# Altium PCB PCB1.PcbDoc
Units mil, origin at the board's own origin, x right, y up, seen from the top; angles counter-clockwise.
Board outline 6000 x 4000 mil, 2 copper layers (Top Layer, Bottom Layer); 172 components, 101 nets, 459 pads, 0 vias.
Unrouted connection lines stored in the file: 347.
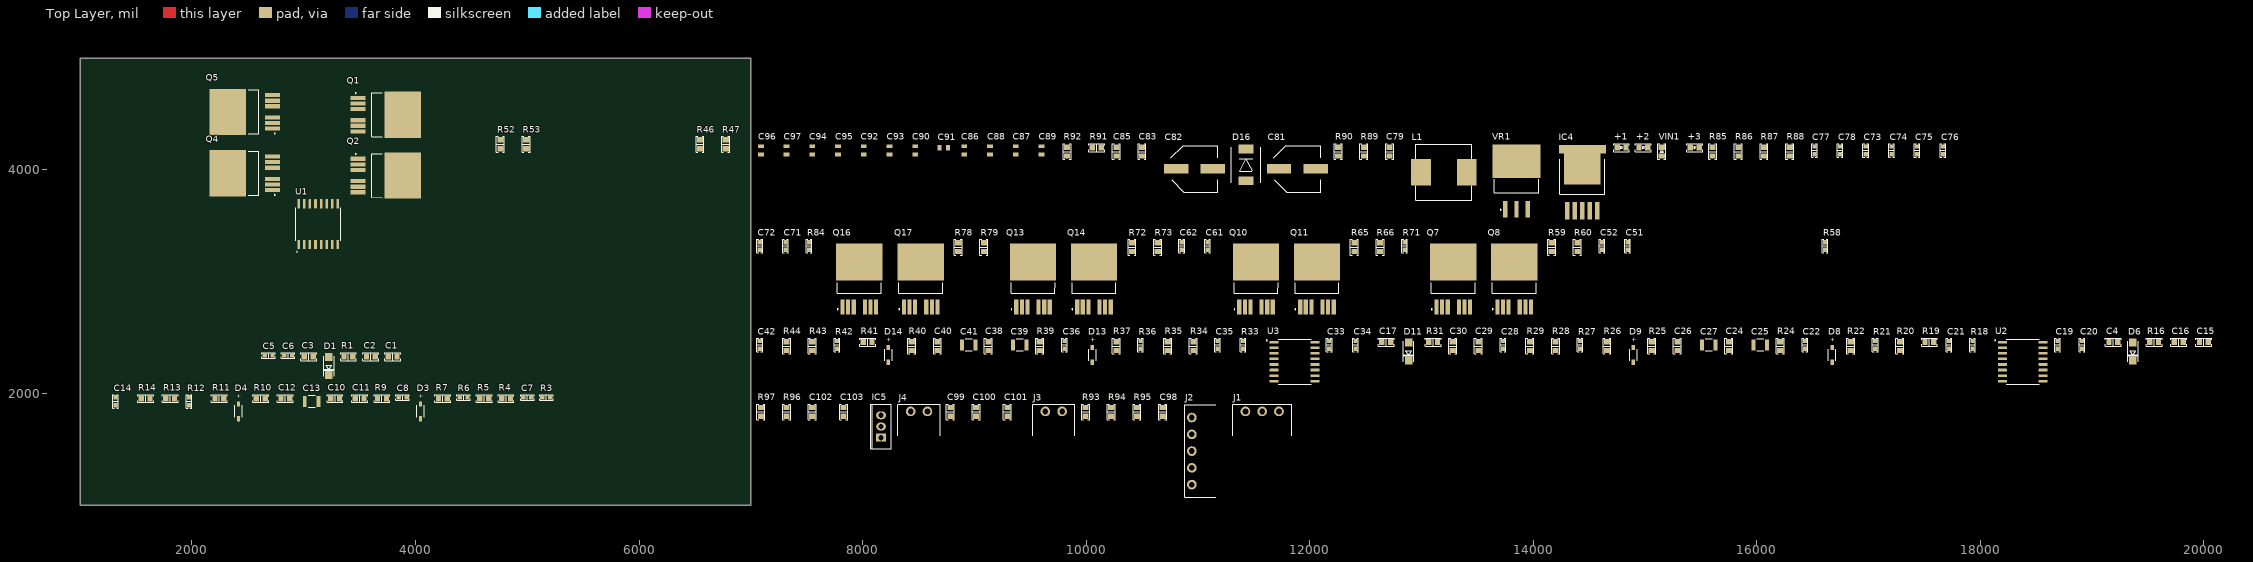
[diagram p0: Top Layer view]
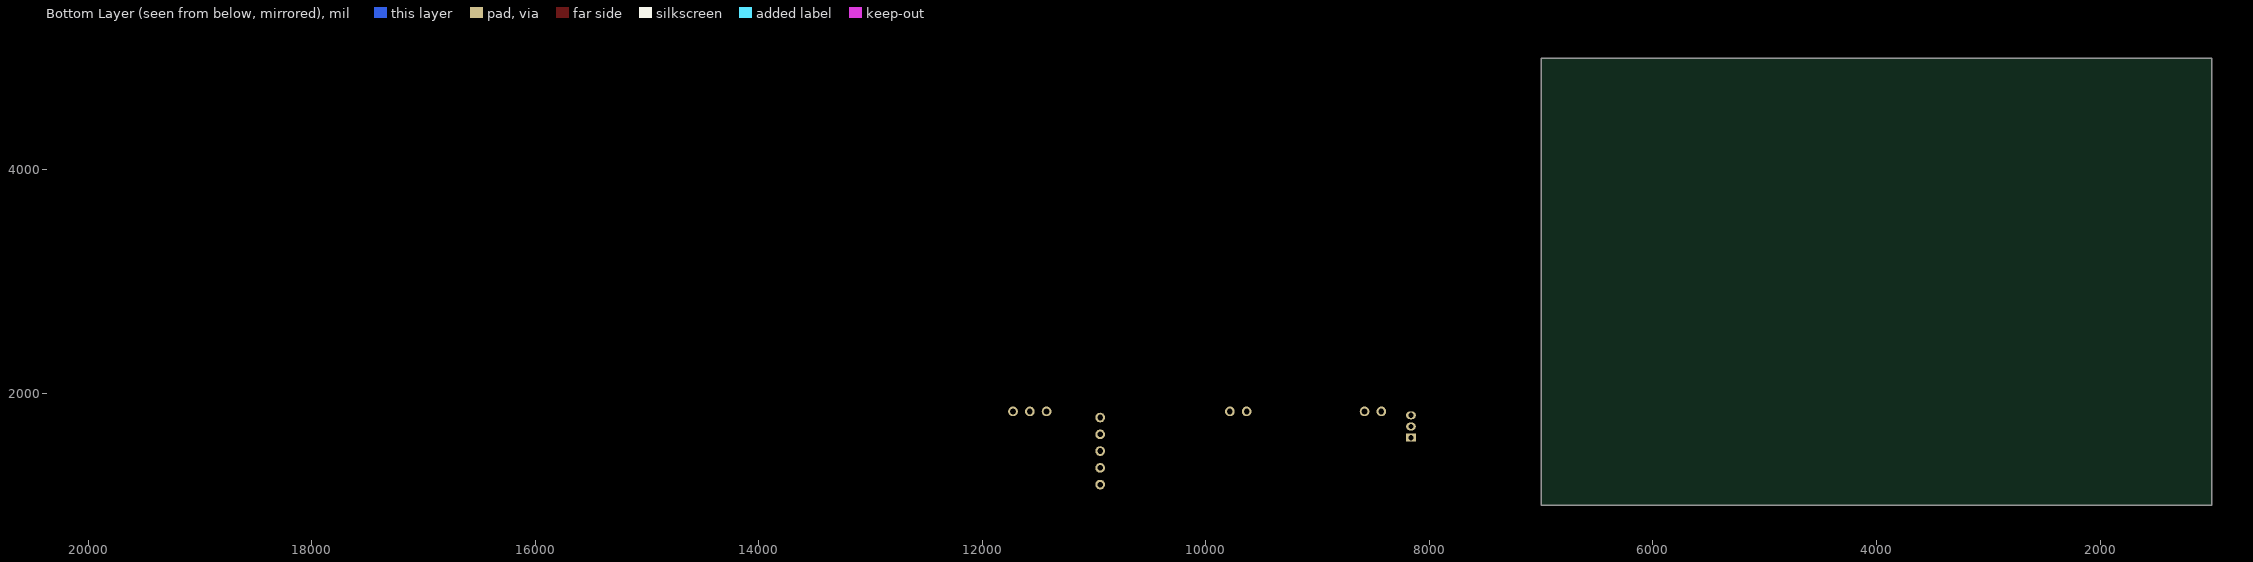
[diagram p1: Bottom Layer view, seen from below]

## Layer stack, top to bottom
Top Solder: solder mask 0.4, Solder Resist, Dk 3.5
Top Layer: signal copper 1.4
Dielectric 1: dielectric 12.6, FR-4, Dk 4.8
Bottom Layer: signal copper 1.4
Bottom Solder: solder mask 0.4, Solder Resist, Dk 3.5

## Board outline
1000,1000 7000,1000 7000,5000 1000,5000

## Design rules (kind name [scope] priority, off if disabled: settings)
Clearance [All] p1: gap=10 ignorepadtopadclearanceinfootprint=FALSE
PolygonConnect [All] p1: connectstyle=Relief reliefconductorwidth=10 reliefentries=4 polygonreliefangle="90 Angle" airgapwidth=10
RoutingVias [All] p1: holewidth=28 width=50 viastyle="Through Hole" minholewidth=28 minwidth=50 maxholewidth=28 maxwidth=50
SolderMaskExpansion [All] p1: expansion=4 istentingtop=FALSE
SupplyNets "Schematic Supply Nets_1" [InNet('REFOUT')] p1: voltage=0.000
SupplyNets "Schematic Supply Nets" [InNet('A_VSS_L')] p2: voltage=0.000
Width [All] p1: maxlimit=10 minlimit=10 preferedwidth=10
30 further rules are at their usual default settings.

## Classes and differential pairs
component class Regulators: +1 +2 +3 B1 B2 B3 B4 B5 B6 C73 C74 C75 C76 C77 C78 C79 C80 C81 C82 C83 C84 C85 C86 C87 C88 C89 C90 C91 C92 C93 C94 C95 C96 C97 D16 IC4 L1 L2 L3 L4 L5 L6 L7 MP4 MP5 R85 R86 R87 R88 R89 R90 R91 R92 U4 U5 VIN1 VR1
component class Power: *IC? C43 C44 C45 C46 C47 C48 C49 C50 C51 C52 C53 C54 C55 C56 C57 C58 C59 C60 C61 C62 C63 C64 C65 C66 C67 C68 C69 C70 C71 C72 IC? MP1 MP2 MP3 Q1 Q2 Q4 Q5 Q7 Q8 Q10 Q11 Q13 Q14 Q16 Q17 R46 R47 R52 R53 R58 R59 R60 R65 R66 R71 R72 R73 R78 R79 R84
component class Driver: C1 C2 C3 C4 C5 C6 C7 C8 C10 C11 C12 C13 C14 C15 C16 C17 C19 C20 C21 C22 C24 C25 C26 C27 C28 C29 C30 C33 C34 C35 C36 C38 C39 C40 C41 C42 D1 D3 D4 D6 D8 D9 D11 D13 D14 R1 R3 R4 R5 R6 R7 R9 R10 R11 R12 R13 R14 R16 R18 R19 R20 R21 R22 R24 R25 R26 R27 R28 R29 R31 R33 R34 R35 R36 R37 R39 R40 R41 R42 R43 R44 U1 U2 U3
component class Connection: C98 C99 C100 C101 C102 C103 IC5 J1 J2 J3 J4 P1 R93 R94 R95 R96 R97

## Components (designator, comment, footprint, x,y, rotation, side; value= is the part's Value field where it differs from the comment)
+1 "Green" 0805LED 14790,4200 r0 top
+2 "Green" 0805LED 14985,4200 r0 top
+3 "Green" 0805LED 15445,4200 r0 top
C1 "100nF 50V" 0805_CAP 3795,2330 r0 top value="100nF 16V"
C2 "1uF 50V" 0805_CAP 3600,2330 r0 top value="100nF 16V"
C3 "100nF 16V" 0805_CAP 3045,2330 r0 top
C4 "100nF 16V" 0805_CAP 19190,2460 r0 top
C5 "100nF 50V" 0603_CAP 2685,2340 r0 top value="1uF 16V"
C6 "1uF 50V" 0603_CAP 2860,2340 r0 top value="1uF 16V"
C7 "2200pF 50V" 0603_CAP 5000,1965 r0 top value="1uF 16V"
C8 "220pF 50V" 0603_CAP 3885,1965 r0 top value="1uF 16V"
C10 "220nF 50V" 0805_CAP 3280,1955 r0 top value="100nF 16V"
C11 "100nF 50V" 0805_CAP 3500,1955 r0 top value="100nF 16V"
C12 "100nF 50V" 0805_CAP 2835,1955 r0 top value="100nF 16V"
C13 "10uF 50V" WCAP-CSGP_1210_L3.2W2.5H0.95 3070,1930 r0 top
C14 "220pF 50V" 0603_CAP 1315,1930 r90 top value="1uF 16V"
C15 "100nF 50V" 0805_CAP 20000,2460 r0 top value="100nF 16V"
C16 "1uF 50V" 0805_CAP 19775,2460 r0 top value="100nF 16V"
C17 "100nF 16V" 0805_CAP 12685,2460 r0 top
C19 "100nF 50V" 0603_CAP 18690,2435 r90 top value="1uF 16V"
C20 "1uF 50V" 0603_CAP 18910,2435 r90 top value="1uF 16V"
C21 "2200pF 50V" 0603_CAP 17720,2435 r90 top value="1uF 16V"
C22 "220pF 50V" 0603_CAP 16430,2435 r90 top value="1uF 16V"
C24 "220nF 50V" 0805_CAP 15750,2425 r90 top value="100nF 16V"
C25 "10uF 50V" WCAP-CSGP_1210_L3.2W2.5H0.95 16030,2435 r0 top
C26 "100nF 50V" 0805_CAP 15290,2425 r90 top value="100nF 16V"
C27 "10uF 50V" WCAP-CSGP_1210_L3.2W2.5H0.95 15570,2435 r0 top
C28 "220pF 50V" 0603_CAP 13730,2435 r90 top value="1uF 16V"
C29 "100nF 50V" 0805_CAP 13510,2425 r90 top value="100nF 16V"
C30 "1uF 50V" 0805_CAP 13280,2425 r90 top value="100nF 16V"
C33 "100nF 50V" 0603_CAP 12175,2435 r90 top value="1uF 16V"
C34 "1uF 50V" 0603_CAP 12410,2435 r90 top value="1uF 16V"
C35 "2200pF 50V" 0603_CAP 11175,2435 r90 top value="1uF 16V"
C36 "220pF 50V" 0603_CAP 9805,2435 r90 top value="1uF 16V"
C38 "220nF 50V" 0805_CAP 9125,2425 r90 top value="100nF 16V"
C39 "10uF 50V" WCAP-CSGP_1210_L3.2W2.5H0.95 9405,2435 r0 top
C40 "100nF 50V" 0805_CAP 8670,2425 r90 top value="100nF 16V"
C41 "10uF 50V" WCAP-CSGP_1210_L3.2W2.5H0.95 8950,2435 r0 top
C42 "220pF 50V" 0603_CAP 7080,2435 r90 top value="1uF 16V"
C51 "220pF 16V" 0603_CAP 14845,3320 r90 top
C52 "100nF 25V" 0603_CAP 14615,3320 r90 top value="1uF 16V"
C61 "1uF 16V" 0603_CAP 11085,3320 r90 top
C62 "100nF 25V" 0603_CAP 10855,3320 r90 top value="1uF 16V"
C71 "1uF 16V" 0603_CAP 7310,3320 r90 top
C72 "100nF 25V" 0603_CAP 7080,3320 r90 top value="1uF 16V"
C73 "10uF 25V" 0603_CAP 16975,4175 r90 top value="1uF 16V"
C74 "10uF 25V" 0603_CAP 17205,4175 r90 top value="1uF 16V"
C75 "10uF 25V" 0603_CAP 17435,4175 r90 top value="1uF 16V"
C76 "10uF 25V" 0603_CAP 17665,4175 r90 top value="1uF 16V"
C77 "100nF 25V" 0603_CAP 16515,4175 r90 top value="1uF 16V"
C78 "100nF 25V" 0603_CAP 16745,4175 r90 top value="1uF 16V"
C79 "100nF 25V" 0805_CAP 12715,4165 r90 top
C81 "220uF 50V" CAPAE1030X1060N 11890,4010 r0 top
C82 "470uF 100V" CAPAE1030X1060N 10970,4010 r0 top
C83 "100nF 100V" 0805_CAP 10500,4165 r90 top value="100nF 25V"
C85 "680pF 25V" 0805_CAP 10270,4165 r90 top
C86 "10uF" WCAP-CSGP_0805_L2W1.25H0.6_Reflow 8910,4175 r90 top
C87 "6.8uF" WCAP-CSGP_0805_L2W1.25H0.6_Reflow 9370,4175 r90 top
C88 "10uF" WCAP-CSGP_0805_L2W1.25H0.6_Reflow 9140,4175 r90 top
C89 "6.8uF" WCAP-CSGP_0805_L2W1.25H0.6_Reflow 9600,4175 r90 top
C90 "10uF" WCAP-CSGP_0805_L2W1.25H0.6_Reflow 8470,4175 r90 top
C91 "6.8uF" WCAP-CSGP_0805_L2W1.25H0.6_Reflow 8725,4200 r0 top
C92 "10uF" WCAP-CSGP_0805_L2W1.25H0.6_Reflow 8010,4175 r90 top
C93 "6.8uF" WCAP-CSGP_0805_L2W1.25H0.6_Reflow 8240,4175 r90 top
C94 "10uF" WCAP-CSGP_0805_L2W1.25H0.6_Reflow 7550,4175 r90 top
C95 "6.8uF" WCAP-CSGP_0805_L2W1.25H0.6_Reflow 7780,4175 r90 top
C96 "10uF" WCAP-CSGP_0805_L2W1.25H0.6_Reflow 7090,4175 r90 top
C97 "6.8uF" WCAP-CSGP_0805_L2W1.25H0.6_Reflow 7320,4175 r90 top
C98 "100nF 16V" 0805_CAP 10685,1835 r90 top
C99 "100nF 35V" 0805_CAP 8785,1835 r90 top
C100 "100nF 35V" 0805_CAP 9015,1835 r90 top
C101 "100nF 35V" 0805_CAP 9295,1835 r90 top
C102 "330nF 50V" 0805_CAP 7550,1835 r90 top
C103 "100nF 25V" 0805_CAP 7830,1835 r90 top
D1 "B0530W-7-F" DO-214AC 3225,2245 r90 top
D3 "SS14" SOD3715X145N 4045,1840 r90 top
D4 "SS14" SOD3715X145N 2415,1840 r90 top
D6 "B0530W-7-F" DO-214AC 19365,2375 r90 top
D8 "SS14" SOD3715X145N 16675,2345 r90 top
D9 "SS14" SOD3715X145N 14895,2345 r90 top
D11 "B0530W-7-F" DO-214AC 12885,2375 r90 top
D13 "SS14" SOD3715X145N 10055,2345 r90 top
D14 "SS14" SOD3715X145N 8230,2345 r90 top
D16 "SS36-HT" DO-214AB 11430,4045 r90 top
IC4 "LM2596HV" TO-263-5 14440,3910 r0 top
IC5 "L7805" TO-220-3 8165,1705 r90 top
J1 "3P 3.81MM" TB3_3.81_90C 11575,1840 r0 top
J2 "5P 3.81mm" "TB5 3.81MM" 10945,1185 r90 top
J3 "2P 3.81mm" TB2_3.81MM 9710,1840 r0 top
J4 "2P 3.81mm" TB2_3.81MM 8505,1840 r0 top
L1 "47uH 2A" "BOURNS SRR1280" 13200,3980 r0 top
Q1 "FDB0260N1007L" FDB0260N1007L 3685,4495 r270 top
Q2 "FDB0260N1007L" FDB0260N1007L 3685,3950 r270 top
Q4 "FDB0260N1007L" FDB0260N1007L 2520.79,3970 r90 top
Q5 "FDB0260N1007L" FDB0260N1007L 2520.79,4520 r90 top
Q7 "FDB0260N1007L" FDB0260N1007L 13285,2975 r0 top
Q8 "FDB0260N1007L" FDB0260N1007L 13830,2975 r0 top
Q10 "FDB0260N1007L" FDB0260N1007L 11520,2975 r0 top
Q11 "FDB0260N1007L" FDB0260N1007L 12065,2975 r0 top
Q13 "FDB0260N1007L" FDB0260N1007L 9525,2975 r0 top
Q14 "FDB0260N1007L" FDB0260N1007L 10070,2975 r0 top
Q16 "FDB0260N1007L" FDB0260N1007L 7970,2975 r0 top
Q17 "FDB0260N1007L" FDB0260N1007L 8520,2975 r0 top
R1 "2 Ohms" 0805_RES 3400,2330 r0 top value="1k Ohms"
R3 "10k Ohms" 0603_RES 5170,1965 r0 top
R4 "10k Ohms" 0805_RES 4810,1955 r0 top value="1k Ohms"
R5 "109 Ohms" 0805_RES 4615,1955 r0 top value="1k Ohms"
R6 "51 Ohms" 0603_RES 4430,1965 r0 top
R7 "76.5 Ohms" 0805_RES 4245,1955 r0 top value="1k Ohms"
R9 "109 Ohms" 0805_RES 3700,1955 r0 top value="1k Ohms"
R10 "76.5 Ohms" 0805_RES 2615,1955 r0 top value="1k Ohms"
R11 "10k Ohms" 0805_RES 2245,1955 r0 top value="1k Ohms"
R12 "51 Ohms" 0603_RES 1975,1930 r90 top
R13 "0 Ohms" 0805_RES 1805,1955 r0 top value="1k Ohms"
R14 "0 Ohms" 0805_RES 1585,1955 r0 top value="1k Ohms"
R16 "2 Ohms" 0805_RES 19555,2460 r0 top value="1k Ohms"
R18 "10k Ohms" 0603_RES 17930,2435 r90 top
R19 "10k Ohms" 0805_RES 17545,2460 r0 top value="1k Ohms"
R20 "109 Ohms" 0805_RES 17280,2425 r90 top value="1k Ohms"
R21 "51 Ohms" 0603_RES 17060,2435 r90 top
R22 "76.5 Ohms" 0805_RES 16840,2425 r90 top value="1k Ohms"
R24 "109 Ohms" 0805_RES 16210,2425 r90 top value="1k Ohms"
R25 "76.5 Ohms" 0805_RES 15060,2425 r90 top value="1k Ohms"
R26 "10k Ohms" 0805_RES 14660,2425 r90 top value="1k Ohms"
R27 "51 Ohms" 0603_RES 14420,2435 r90 top
R28 "0 Ohms" 0805_RES 14200,2425 r90 top value="1k Ohms"
R29 "0 Ohms" 0805_RES 13970,2425 r90 top value="1k Ohms"
R31 "2 Ohms" 0805_RES 13105,2460 r0 top value="1k Ohms"
R33 "10k Ohms" 0603_RES 11405,2435 r90 top
R34 "10k Ohms" 0805_RES 10960,2425 r90 top value="1k Ohms"
R35 "109 Ohms" 0805_RES 10730,2425 r90 top value="1k Ohms"
R36 "51 Ohms" 0603_RES 10485,2435 r90 top
R37 "76.5 Ohms" 0805_RES 10270,2425 r90 top value="1k Ohms"
R39 "109 Ohms" 0805_RES 9585,2425 r90 top value="1k Ohms"
R40 "76.5 Ohms" 0805_RES 8440,2425 r90 top value="1k Ohms"
R41 "10k Ohms" 0805_RES 8045,2460 r0 top value="1k Ohms"
R42 "51 Ohms" 0603_RES 7770,2435 r90 top
R43 "0 Ohms" 0805_RES 7550,2425 r90 top value="1k Ohms"
R44 "0 Ohms" 0805_RES 7320,2425 r90 top value="1k Ohms"
R46 "3 Ohms" 0805_RES 6545,4230 r90 top value="1k Ohms"
R47 "3 Ohms" 0805_RES 6775,4230 r90 top value="1k Ohms"
R52 "3 Ohms" 0805_RES 4760,4230 r90 top value="1k Ohms"
R53 "3 Ohms" 0805_RES 4990,4230 r90 top value="1k Ohms"
R58 "120 Ohms" 0603_RES 16610,3320 r90 top
R59 "3 Ohms" 0805_RES 14165,3310 r90 top value="1k Ohms"
R60 "3 Ohms" 0805_RES 14395,3310 r90 top value="1k Ohms"
R65 "3 Ohms" 0805_RES 12400,3310 r90 top value="1k Ohms"
R66 "3 Ohms" 0805_RES 12630,3310 r90 top value="1k Ohms"
R71 "1k Ohms" 0603_RES 12850,3320 r90 top
R72 "3 Ohms" 0805_RES 10410,3310 r90 top value="1k Ohms"
R73 "3 Ohms" 0805_RES 10640,3310 r90 top value="1k Ohms"
R78 "3 Ohms" 0805_RES 8855,3310 r90 top value="1k Ohms"
R79 "3 Ohms" 0805_RES 9085,3310 r90 top value="1k Ohms"
R84 "1k Ohms" 0603_RES 7520,3320 r90 top
R85 "2k2 Ohms" 0805_RES 15605,4165 r90 top
R86 "10K Ohms" 0805_RES 15835,4165 r90 top
R87 "22K Ohms" 0805_RES 16065,4165 r90 top
R88 "20K Ohms" 0805_RES 16295,4165 r90 top
R89 "1k Ohms" 0805_RES 12485,4165 r90 top
R90 "11k Ohms" 0805_RES 12255,4165 r90 top
R91 "1k Ohms" 0805_RES 10095,4200 r0 top
R92 "35K Ohms" 0805_RES 9830,4165 r90 top value="2k2 Ohms"
R93 "10k Ohms" 0805_RES 9995,1835 r90 top
R94 "10k Ohms" 0805_RES 10225,1835 r90 top
R95 "10k Ohms" 0805_RES 10455,1835 r90 top
R96 "100k Ohms" 0805_RES 7320,1835 r90 top
R97 "5.5k Ohms" 0805_RES 7090,1835 r90 top
U1 "UCC21520DWR" SOIC127P1030X265-16N 3130,3515 r90 top
U2 "UCC21520DWR" SOIC127P1030X265-16N 18380,2285 r0 top
U3 "UCC21520DWR" SOIC127P1030X265-16N 11865,2285 r0 top
VIN1 "Green" 0805LED 15150,4165 r90 top
VR1 "TL783" TL783 13750,3650 r0 top

## Footprints (in the part's own frame and the unit in brackets; to place one, negate y for a bottom-side part, rotate by r counter-clockwise, add the part's x,y. Pads: shape width x height; smd on the part's side, far side on the other; paste and mask are expansions set on the pad)
0603_CAP [mm]
  rect 1x0.95 smd mask+0.08: 1(-0.889,0) 2(0.889,0)
  silkscreen extent -1.52,-0.64 1.52,0.64, body extent -0.8,-0.4 0.8,0.4, height 0.96
0603_RES [mm]
  rect 1x0.95 smd mask+0.08: 1(-0.889,0) 2(0.889,0)
  silkscreen extent -1.52,-0.64 1.52,0.64, body extent -0.85,-0.4 0.85,0.4, height 0.56
0805_CAP [mm]
  rect 1.2x1.4 smd: 1(-1,0) 2(1,0)
  silkscreen extent -1.8,-0.9 1.8,0.9, body extent -1,-0.62 1,0.63, height 0.6
0805_RES [mm]
  rect 1.2x1.4 smd: 1(-1,0) 2(1,0)
  silkscreen extent -1.8,-0.9 1.8,0.9, body extent -1,-0.62 1,0.63, height 0.6
0805LED [mm]
  rect 1.2x1.4 smd: 1(-1,0) 2(1,0)
  silkscreen extent -1.8,-0.9 1.8,0.9, body extent -1.01,-0.62 1.01,0.63, height 1.1
"BOURNS SRR1280" [mm]
  rect 4.5x6 smd: 1(-5.2,0) 2(5.2,0)
  silkscreen extent -6.4,-6.4 6.4,6.4, body extent -6.25,-6.25 6.25,6.25, height 7.9
CAPAE1030X1060N [mm]
  rect 5.5x2.2 smd: 1(-4.15,0) 2(4.15,0)
  silkscreen extent -5.4,-5.3 5.3,5.3, body extent -5.6,-5.25 5.6,5.25, height 10.6
DO-214AB [mm]
  rect 2x3.5 smd mask+0.05: 1(-3.6,0) 2(3.6,0)
  silkscreen extent -4,-3.3 4,3.3, body extent -3.95,-2.9 3.95,2.9, height 2.5
DO-214AC [mm]
  rect 1.8x1.7 smd: A(2.05,0) K(-2.05,0)
  silkscreen extent -2.3,-1.2 2.3,1.2, body extent -2.6,-1.36 2.6,1.36, height 2.5
FDB0260N1007L [mm]
  rect 0.95x3.45 smd: 1(-3.81,-5.1) 2(-2.54,-5.1) 3(-1.27,-5.1) 5(1.27,-5.1) 6(2.54,-5.1) 7(3.81,-5.1)
  rect 10.5x8.4 smd: 4(0,5.1)
  silkscreen extent -5,-5.7 5,0.4
SOD3715X145N [mm]
  rect 1.21x0.72 smd: A(1.68,0) C(-1.68,0)
  silkscreen extent -1.35,-0.85 1.35,0.85
SOIC127P1030X265-16N [mm]
  rrect25% 2.06x0.6 smd: 1(-4.64,4.445) 2(-4.64,3.175) 3(-4.64,1.905) 4(-4.64,0.635) 5(-4.64,-0.635) 6(-4.64,-1.905) 7(-4.64,-3.175) 8(-4.64,-4.445) 9(4.64,-4.445) 10(4.64,-3.175) 11(4.64,-1.905) 12(4.64,-0.635) 13(4.64,0.635) 14(4.64,1.905) 15(4.64,3.175) 16(4.64,4.445)
  silkscreen extent -6.4,-5.15 3.75,5.15, body extent -5.15,-5.15 5.15,5.15, height 2.65
TB2_3.81MM [mm]
  round 2.2 hole 1.3 mask+0.05: 1(-1.905,0) 2(1.905,0)
  silkscreen extent -4.8,-5.5 4.8,1.6, body extent -4.5,-17.1 4.5,1.3, height 7.88
TB3_3.81_90C [mm]
  round 2.2 hole 1.3 mask+0.05: 1(-3.81,0) 2(0,0) 3(3.81,0)
  silkscreen extent -6.71,-5.5 6.7,1.6, body extent -6.11,-17.15 6.11,1.2, height 7.37
"TB5 3.81MM" [mm]
  round 2.2 hole 1.3 mask+0.05: 1(0,0) 2(3.81,0) 3(7.62,0) 4(11.43,0) 5(15.24,0)
  silkscreen extent -2.9,-5.5 18.19,1.6, body extent -2.53,-7.94 17.71,1.26, height 7.27
TL783 [mm]
  rect 0.99x3.79 smd: 1(0,0) 2(2.54,0) 3(5.08,0)
  rect 10.84x7.62 smd paste-6: 4(2.54,10.88)
  silkscreen extent -2.54,-0.24 7.62,6.76, body extent -2.54,-0.71 7.62,14.53, height 4.83
TO-220-3 [mm]
  rect 1.8x2.2 hole 1.2: 1(-2.54,0)
  oval 1.8x2.2 hole 1.2: 2(0,0) 3(2.54,0)
  silkscreen extent -5.08,-2.29 5.08,2.29, body extent -4.97,-2.16 4.93,2.34, height 20.8
TO-263-5 [mm]
  rect 1.02x4 smd: 1(-3.436,-7.005) 2(-1.736,-7.005) 3(-0.036,-7.005) 4(1.664,-7.005) 5(3.364,-7.005)
  rect 1.235x1.91 smd: 3(-4.735,7.005) 3(4.735,6.993)
  rect 8.33x9 smd: 3(-0.036,3.456)
  silkscreen extent -5.12,-3.18 5.04,4.7, body extent -5.12,-7.78 5.04,6.57, height 4.72
WCAP-CSGP_0805_L2W1.25H0.6_Reflow [mm] "Ceramic Capacitors, body 2x1.25mm"
  rect 0.9x1.3 smd: 1(-0.95,0) 2(0.95,0)
  body extent -1,-0.63 1,0.63, height 0.6
WCAP-CSGP_1210_L3.2W2.5H0.95 [mm] "Ceramic Capacitors, body 3.2x2.5mm"
  rect 0.9x2.5 smd: 1(-1.55,0) 2(1.55,0)
  silkscreen extent -0.8,-1.35 0.8,1.35, body extent -1.6,-1.25 1.6,1.25, height 0.95

## Part data
+1 +2 +3 VIN1: library part LED, "0805"
C1 C2 C3 C4 C10 C11 C12 C15 C16 C17 C24 C26 C29 C30 C38 C40 C79 C83 C85 C98 C99 C100 C101 C102 C103: library part CAP_0805
C5 C6 C7 C8 C14 C19 C20 C21 C22 C28 C33 C34 C35 C36 C42 C51 C52 C61 C62 C71 C72 C73 C74 C75 C76 C77 C78: library part CAP_0603, "CL10B105KO8NNNC - MLCC (1608) 0603 1uF 16VDC ±10% X7R"
C13 C25 C27 C39 C41: library part 885012009019, "WCAP-CSGP Multilayer Ceramic Chip Capacitor, General Purpose, size 1210, NP0, 2.2nF, 50V", Capacitance=2.2nF, Capacitance Tolerance=+/-5%, Case/Size Code=1210, Insulation Resistance=10GΩ, manufacturer="Wurth Elektronik", Max Operating Temperature=125°C, Min Operating Temperature=-55°C, Rated Voltage (DC)=50V, Category="Multilayer Ceramic Chip Capacitors", Ceramic Type=NP0, ComponentLink1Description="Website Link", ComponentLink1URL=https://www.we-online.com/redexpert/article/885012009019?ad, ComponentLink2Description="Datasheet Link", ComponentLink2URL=https://www.we-online.com/redexpert/spec/885012009019?ad, Height=0.95mm, Length=3.2mm, Manufacturer Part Number=885012009019, Match Code=WCAP-CSGP, Mount="Surface Mount", packaging="Tape and Reel", Q Factor=1000, Technical Reference=NP01210222J050DFCT10000, Width=2.5mm
C81 C82: library part CK1H221M-CRG10, "Capacitor Polarised", Manufacturer_Name=SEMTECH, Datasheet Link=https://datasheet.lcsc.com/szlcsc/1810281207_ST-Semtech-CK1H221M-CRG10_C131159.pdf, Height=10.6mm, Manufacturer_Part_Number=CK1H221M-CRG10
C86 C87 C88 C89 C90 C91 C92 C93 C94 C95 C96 C97: library part 885012007012, "WCAP-CSGP Multilayer Ceramic Chip Capacitor, General Purpose, size 0805, NP0, 22pF, 16V", Capacitance=22pF, Capacitance Tolerance=+/-5%, Case/Size Code=0805, Insulation Resistance=10GΩ, manufacturer="Wurth Elektronik", Max Operating Temperature=125°C, Min Operating Temperature=-55°C, Rated Voltage (DC)=16V, Category="Multilayer Ceramic Chip Capacitors", Ceramic Type=NP0, ComponentLink1Description="Website Link", ComponentLink1URL=https://www.we-online.com/redexpert/article/885012007012?ad, ComponentLink2Description="Datasheet Link", ComponentLink2URL=https://www.we-online.com/redexpert/spec/885012007012?ad, Height=0.6mm, Length=2mm, Manufacturer Part Number=885012007012, Match Code=WCAP-CSGP, Mount="Surface Mount", packaging="Tape and Reel", Q Factor=840, Technical Reference=NP00805220J016DFCT10000, Width=1.25mm
D1 D6 D11: library part SS14, "Diode Schottky 40 V 1A Surface Mount DO-214AC (SMA)", Package="SMA-2 ON Semiconductor", Check_prices=https://www.snapeda.com/parts/SS14/Onsemi/view-part/?ref=eda, MF="ON Semiconductor", MP=SS14, SnapEDA_Link=https://www.snapeda.com/parts/SS14/Onsemi/view-part/?ref=snap
D3 D4 D8 D9 D13 D14: library part B0530W-7-F, "Diode Schottky 30V 500mA Surface Mount SOD-123", Package="SOD-123 Diodes Inc.", Availability=Unavailable, MF="Diodes Inc.", MP=B0530W-7-F, Price=None, SnapEDA_Link=https://www.snapeda.com/parts/B0530W-7-F/Diodes%20Inc./view-part/272168/?ref=snap
D16: library part SS36-214AB-HT, "Schottky Diode", ComponentLink1Description=Özdisan, ComponentLink1URL=https://ozdisan.com/guc-yari-iletkenleri/diyotlar-modul-diyotlar-ve-dogrultucular/schottky-diyotlar/SS36-214AB-HT/475999, ComponentLink2Description=Datasheet, ComponentLink2URL=https://cdn.ozdisan.com/ETicaret_Dosya/475999_7494647.pdf, PartNumber=SS36-HT
IC4: "Integrated Circuit", Arrow Part Number=LM2596S-12, Manufacturer_Name="Texas Instruments", Mouser Part Number=926-LM2596S-12, Arrow Price/Stock=https://www.arrow.com/en/products/lm2596s-12/texas-instruments, Datasheet Link=http://www.ti.com/lit/ds/symlink/lm2596.pdf, Mouser Price/Stock=https://www.mouser.co.uk/ProductDetail/Texas-Instruments/LM2596S-12?qs=X1J7HmVL2ZEK1FPBBSYJCA%3D%3D, PartValue=LM2596HV
IC5: library part L7806, "L7806CV-DG - IC-7806 V.REG.+5V 1.5A TO220 DOUBLE GAUGE ST", ComponentLink1Description=Özdisan, ComponentLink1URL=https://ozdisan.com/entegre-devreler-ics/guc-entegreleri/lineer-voltaj-regulatorleri/L7806CV-DG/5861, ComponentLink2Description=Datasheet, ComponentLink2URL=https://cdn.ozdisan.com/ETicaret_Dosya/39226_7065362.pdf, PartValue=L7805
J1: library part "TBLOCK3 3.81MM", "15EDGRC-3.81-03P-11-00AH - TERM.BLK.3.81MM 3P 90C MALE GRAY CLOSED", ComponentLink1Description=Özdisan, ComponentLink1URL=https://www.ozdisan.com/Product/Detail/515263/15EDGRC-3-81-03P-11-00AH, ComponentLink2Description=Datasheet, ComponentLink2URL=https://enoss.degson.com/upload/file/20210313/10030000179/15EDGRC-3.81-XXP-1Y-00A(H)T0-1.pdf
J2: library part "TBLOCK5 3.81MM", "15EDGRC-3.81-05P-14-00AH - TERM.BLK.3.81MM 5P 90C MALE GREEN CLOSED", ComponentLink1Description=Özdisan, ComponentLink1URL=https://www.ozdisan.com/konnektor-ve-baglanti-elemanlari/klemensler/gecmeli-klemensler/15EDGRC-3-81-05P-14-00AH, ComponentLink2Description=Datasheet, ComponentLink2URL=https://enoss.degson.com/upload/file/20210313/10030000179/15EDGRC-3.81-XXP-1Y-00A(H)T0-1.pdf
J3 J4: library part "TBLOCK2 3.81MM", "15EDGRC-3.81-02P-11-00AH - TERM.BLK.3.81MM 2P 90C MALE GRAY CLOSED", ComponentLink1Description=Özdisan, ComponentLink1URL=https://ozdisan.com/konnektor-ve-baglanti-elemanlari/klemensler/gecmeli-klemensler/15EDGRC-3-81-02P-11-00AH
L1: library part Inductor, "FIXED IND 47UH 2.9A 80 MOHM SMD"
Q1 Q2 Q4 Q5 Q7 Q8 Q10 Q11 Q13 Q14 Q16 Q17: "MOSFET 100V TO263 7L JEDEC GREEN EMC", Manufacturer_Name=onsemi, Mouser Part Number=512-FDB0260N1007L, Arrow Part Number=FDB0260N1007L, Arrow Price/Stock=https://www.arrow.com/en/products/fdb0260n1007l/on-semiconductor, Datasheet Link=https://componentsearchengine.com/Datasheets/2/FDB0260N1007L.pdf, Geometry.Height=4.7mm, Manufacturer_Part_Number=FDB0260N1007L, Mouser Price/Stock=https://www.mouser.co.uk/ProductDetail/ON-Semiconductor-Fairchild/FDB0260N1007L?qs=lDZPRidwxxtoCZGWdM7x%2FA%3D%3D
R1 R4 R5 R7 R9 R10 R11 R13 R14 R16 R19 R20 R22 R24 R25 R26 R28 R29 R31 R34 R35 R37 R39 R40 R41 R43 R44 R46 R47 R52 R53 R59 R60 R65 R66 R72 R73 R78 R79 R85 R86 R87 R88 R89 R90 R91 R92 R93 R94 R95 R96 R97: library part RES_0805, "0805", Power="1/8 W"
R3 R6 R12 R18 R21 R27 R33 R36 R42 R58: library part "1k Ohms"
U1 U2 U3: "5.7kVrms, 4A/6A dual-channel isolated gate driver w/ dual input, disable pin, 8V UVLO in DW package", Package="SOIC-16 Texas Instruments", Availability="In Stock", Check_prices=https://www.snapeda.com/parts/UCC21520DWR/Texas+Instruments/view-part/?ref=eda, MF="Texas Instruments", MP=UCC21520DWR, Price=None, Purchase-URL=https://pricing.snapeda.com/search/part/UCC21520DWR/?ref=eda, SnapEDA_Link=https://www.snapeda.com/parts/UCC21520DWR/Texas+Instruments/view-part/?ref=snap
VR1: library part TL783/SMD

## Nets (pads, with @x,y where several pads share a name; then routed paths per layer and width w, separated by ;. In a path a pad name is that pad's centre, name@x,y a point inside that pad or via, vN(x,y) a via of type N, cw(c..) or ccw(c..) an arc to the next point about the centre after c; other vN are vias at no path point)
+3.3V: C62.1 C72.1
+5V: C3.2 C4.2 C5.2 C6.2 C19.2 C20.2 C33.2 C34.2 C73.2 C74.2 R85.1 U1.3 U1.8 U2.3 U2.8 U3.3 U3.8
+12V: C1.2 C2.2 C15.2 C16.2 C29.2 C30.2 R1.2 R16.2 R31.2
+15V: C77.2 C78.2 C81.1 C85.2 C102.2 IC5.1 L1.2 R86.1 R90.2
+45V: C79.2 C82.1 C83.2 IC4.1 R88.1 R89.1 VR1.2 VR1.4
A_IN_H: R6.1
A_IN_L: R12.1
A_VSS_H: C12.2 C13.1 Q1.2 Q1.3 Q1.5 Q1.6 Q1.7 Q2.2 Q2.3 Q2.5 Q2.6 Q2.7 Q4.4 Q5.4 R4.1 R13.2 U1.14
A_VSS_L: +1.2 +2.2 +3.2 C1.1 C2.1 C3.1 C4.1 C5.1 C6.1 C7.2 C8.1 C10.2 C11.2 C14.1 C15.1 C16.1 C17.1 C19.1 C20.1 C21.2 C22.1 C24.2 C25.1 C28.1 C29.1 C30.1 C33.1 C34.1 C35.2 C36.1 C38.2 C39.1 C42.1 C51.1 C52.2 C61.1 C61.2 C62.2 C71.1 C72.2 C73.1 C74.1 C75.1 C76.1 C77.1 C78.1 C79.1 C81.2 C82.2 C83.1 C86.1 C87.1 C88.1 C89.1 C90.1 C91.1 C92.1 C93.1 C94.1 C95.1 C96.1 C97.1 C98.1 C99.1 C100.1 C101.1 C102.1 C103.1 D16.1 IC4.3 IC4.5 IC5.2 J1.1 J2.5 J3.2 J4.2 Q4.2 Q4.3 Q4.5 Q4.6 Q4.7 Q5.2 Q5.3 Q5.5 Q5.6 Q5.7 Q10.2 Q10.3 Q10.5 Q10.6 Q10.7 Q11.2 Q11.3 Q11.5 Q11.6 Q11.7 Q16.2 Q16.3 Q16.5 Q16.6 Q16.7 Q17.2 Q17.3 Q17.5 Q17.6 Q17.7 R3.2 R11.2 R14.2 R18.2 R26.2 R29.2 R33.2 R41.2 R44.2 R71.2 R91.1 R92.2 R97.2 U1.4 U1.5 U1.9 U2.4 U2.5 U2.9 U3.4 U3.5 U3.9 VIN1.2
B_IN_H: R21.1
B_IN_L: R27.1
B_VSS_H: C26.2 C27.1 Q7.2 Q7.3 Q7.5 Q7.6 Q7.7 Q8.2 Q8.3 Q8.5 Q8.6 Q8.7 Q10.4 Q11.4 R19.1 R28.2 U2.14
C_IN_H: R36.1
C_IN_L: R42.1
C_VSS_H: C40.2 C41.1 Q13.2 Q13.3 Q13.5 Q13.6 Q13.7 Q14.2 Q14.3 Q14.5 Q14.6 Q14.7 Q16.4 Q17.4 R34.1 R43.2 U3.14
COUT_A: C51.2 R58.2
COUT_C: C71.2 R84.2
ENABLE: J3.1
FB: C85.1 IC4.4 R90.1 R91.2
FWD/REV: J4.1
HA: C99.2 J2.2 R93.2
HB: C100.2 J2.3 R94.2
HC: C101.2 J2.4 R95.2
ISO_5V: C75.2 C76.2
ISO_+12_A_H: C12.1 C13.2 D1.K U1.16
ISO_+12_A_L: C10.1 C11.1 U1.11
ISO_+12_B_H: C26.1 C27.2 D6.K U2.16
ISO_+12_B_L: C24.1 C25.2 U2.11
ISO_+12_C_H: C40.1 C41.2 D11.K U3.16
ISO_+12_C_L: C38.1 C39.2 U3.11
ISO_-12_A_H: R13.1
ISO_-12_A_L: R14.1
ISO_-12_B_H: R28.1
ISO_-12_B_L: R29.1
ISO_-12_C_H: R43.1
ISO_-12_C_L: R44.1
Net+1_1: +1.1 R85.2
Net+2_1: +2.1 R86.2
Net+3_1: +3.1 R88.2
NetB1_2: C86.2 C87.2
NetB2_2: C88.2 C89.2
NetB3_2: C90.2 C91.2
NetB4_2: C92.2 C93.2
NetB5_2: C94.2 C95.2
NetB6_2: C96.2 C97.2
NetC7_1: C7.1 R3.1 U1.6
NetC8_2: C8.2 R6.2 U1.1
NetC14_2: C14.2 R12.2 U1.2
NetC21_1: C21.1 R18.1 U2.6
NetC22_2: C22.2 R21.2 U2.1
NetC28_2: C28.2 R27.2 U2.2
NetC35_1: C35.1 R33.1 U3.6
NetC36_2: C36.2 R36.2 U3.1
NetC42_2: C42.2 R42.2 U3.2
NetC52_1: C52.1
NetC53_2: Q7.4
NetC63_2: Q13.4
NetD1_A: D1.A R1.1
NetD3_A: D3.A R7.1
NetD3_C: D3.C R5.1 U1.15
NetD4_A: D4.A R10.1
NetD4_C: D4.C R9.1 U1.10
NetD6_A: D6.A R16.1
NetD8_A: D8.A R22.1
NetD8_C: D8.C R20.1 U2.15
NetD9_A: D9.A R25.1
NetD9_C: D9.C R24.1 U2.10
NetD11_A: D11.A R31.1
NetD13_A: D13.A R37.1
NetD13_C: D13.C R35.1 U3.15
NetD14_A: D14.A R40.1
NetD14_C: D14.C R39.1 U3.10
NetD16_2: D16.2 IC4.2 L1.1
NetIC?_3: R58.1
NetQ1_1: Q1.1 R46.2
NetQ2_1: Q2.1 R47.2
NetQ4_1: Q4.1 R52.2
NetQ5_1: Q5.1 R53.2
NetQ7_1: Q7.1 R59.2
NetQ8_1: Q8.1 R60.2
NetQ10_1: Q10.1 R65.2
NetQ11_1: Q11.1 R66.2
NetQ13_1: Q13.1 R72.2
NetQ14_1: Q14.1 R73.2
NetQ16_1: Q16.1 R78.2
NetQ17_1: Q17.1 R79.2
NetR87_2: R87.2 VIN1.1
NetR89_2: R89.2 R92.1 VR1.1
PHASE_A: 
Phase_A_H: R4.2 R5.2 R7.2 R46.1 R47.1
Phase_A_L: R9.2 R10.2 R11.1 R52.1 R53.1
PHASE_B: 
Phase_B_H: R19.2 R20.2 R22.2 R59.1 R60.1
Phase_B_L: R24.2 R25.2 R26.1 R65.1 R66.1
PHASE_C: 
Phase_C_H: R34.2 R35.2 R37.2 R72.1 R73.1 R78.1 R79.1
Phase_C_L: R39.2 R40.2 R41.1
PVDD: Q1.4 Q2.4 Q8.4 Q14.4 R87.1 R96.1 VR1.3
REFOUT: C98.2 C103.2 IC5.3 J1.3 J2.1 R93.1 R94.1 R95.1
SPEED: J1.2
V_Sense: R96.2 R97.1
pads on no net: C17.2 R71.1 R84.1 U1.7 U1.12 U1.13 U2.7 U2.12 U2.13 U3.7 U3.12 U3.13

## Text inside footprints (layer, text, board x,y; h text height)
D3: Top Overlay "+" at 4065,1955.02 h39.38 r90
D4: Top Overlay "+" at 2435,1955.02 h39.38 r90
D8: Top Overlay "+" at 16695,2460.02 h39.38 r90
D9: Top Overlay "+" at 14915,2460.02 h39.38 r90
D13: Top Overlay "+" at 10075,2460.02 h39.38 r90
D14: Top Overlay "+" at 8250,2460.02 h39.38 r90